# Altium PCB Battery_Converter.PcbDoc (part 1 of 2)
Units mm, origin at the board's own origin, x right, y up, seen from the top; angles counter-clockwise.
Board outline 240.65 x 121.03 mm, 2 copper layers (Power Layer, Signal Layer), stack 0.532 mm thick; 177 components, 92 nets, 492 pads, 9 vias.
Unrouted connection lines stored in the file: 129.
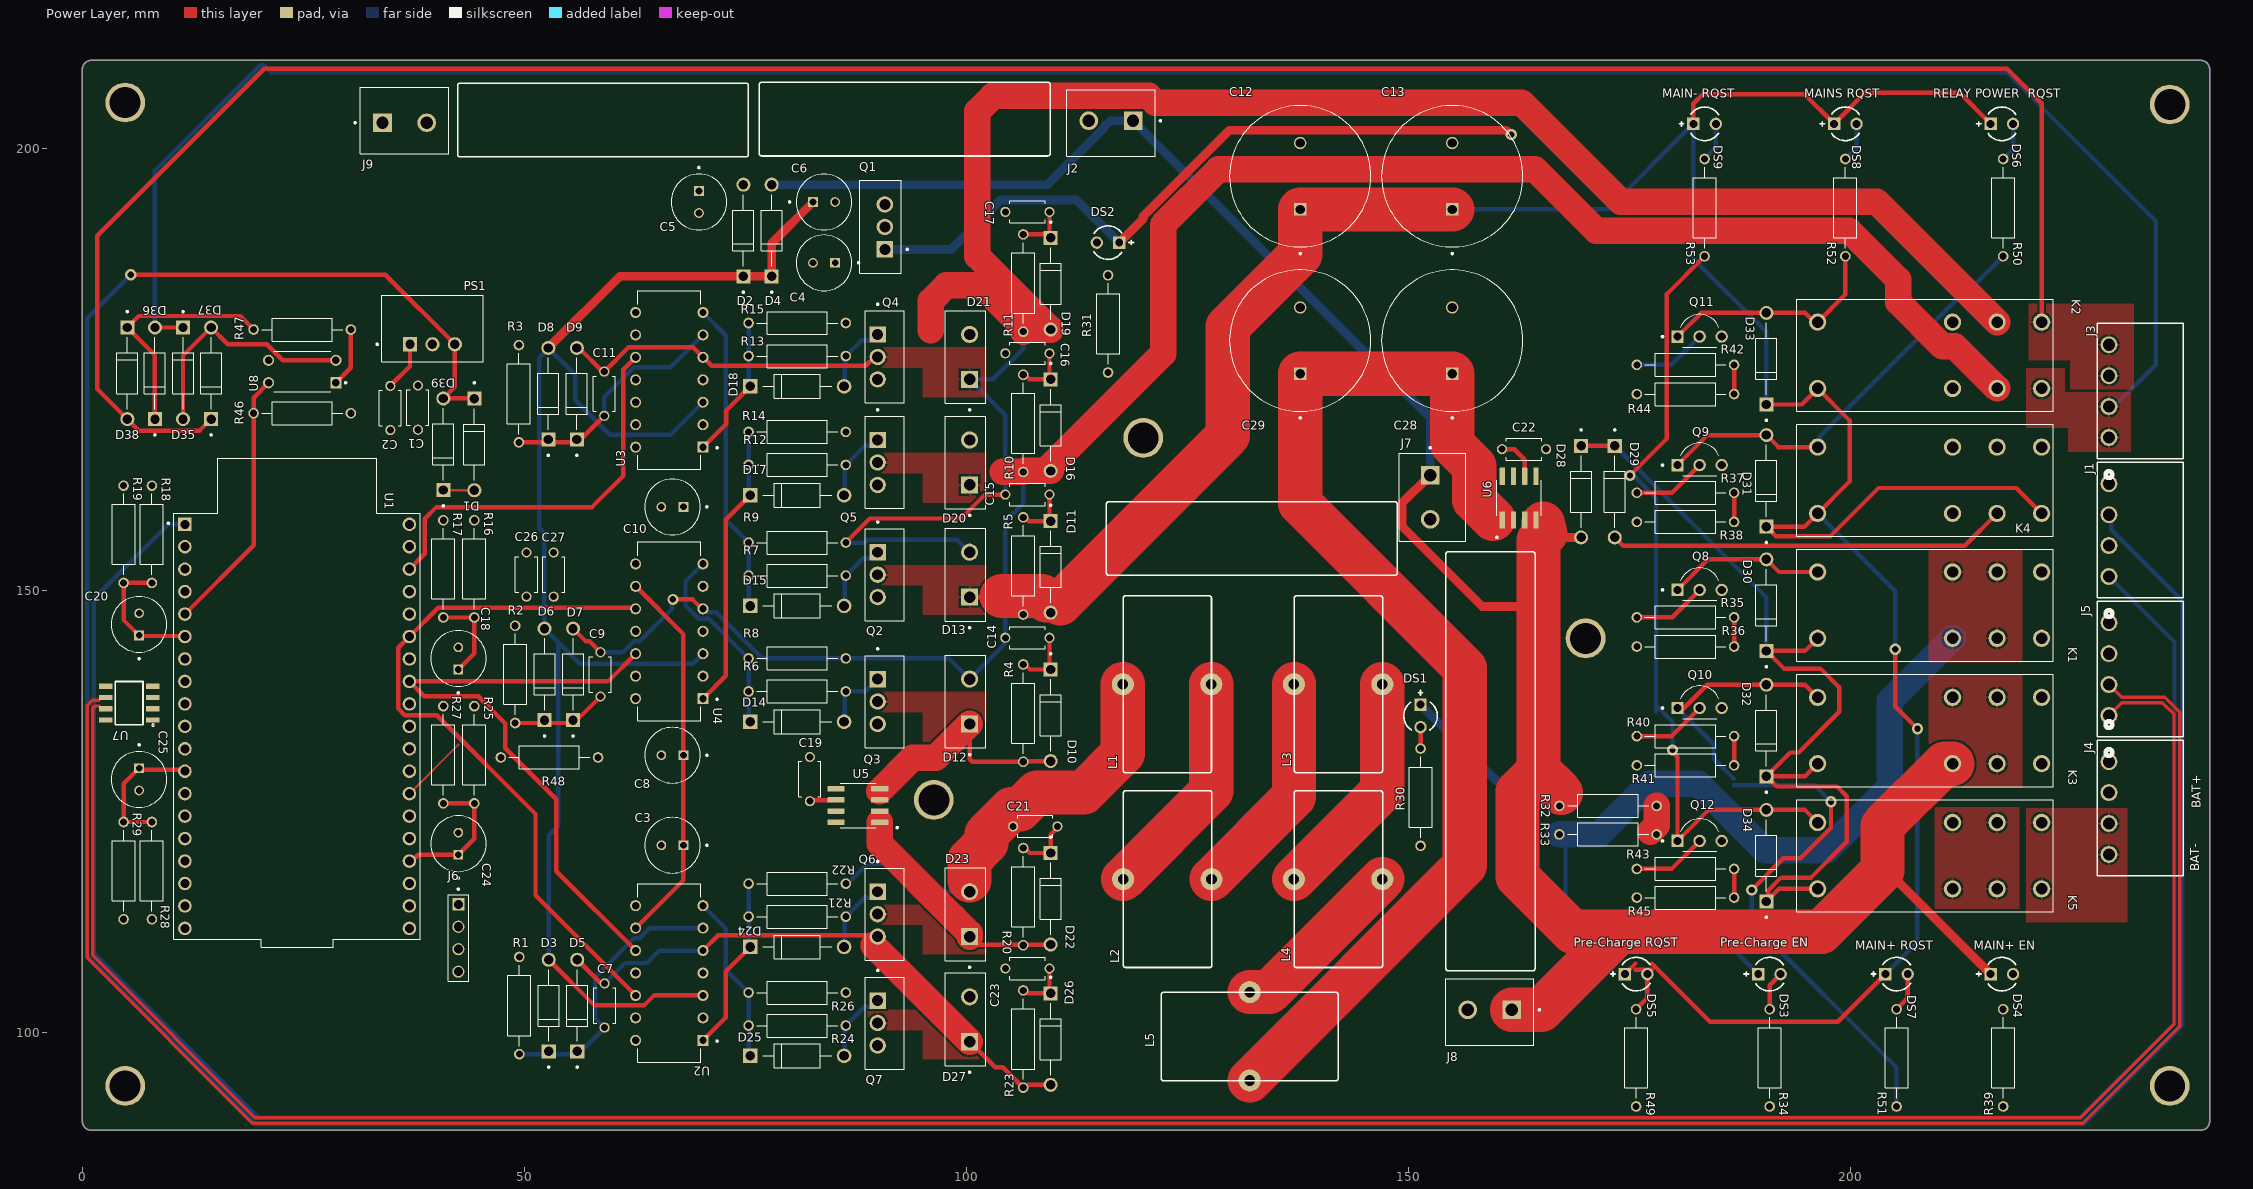
[diagram p0: Power Layer view]
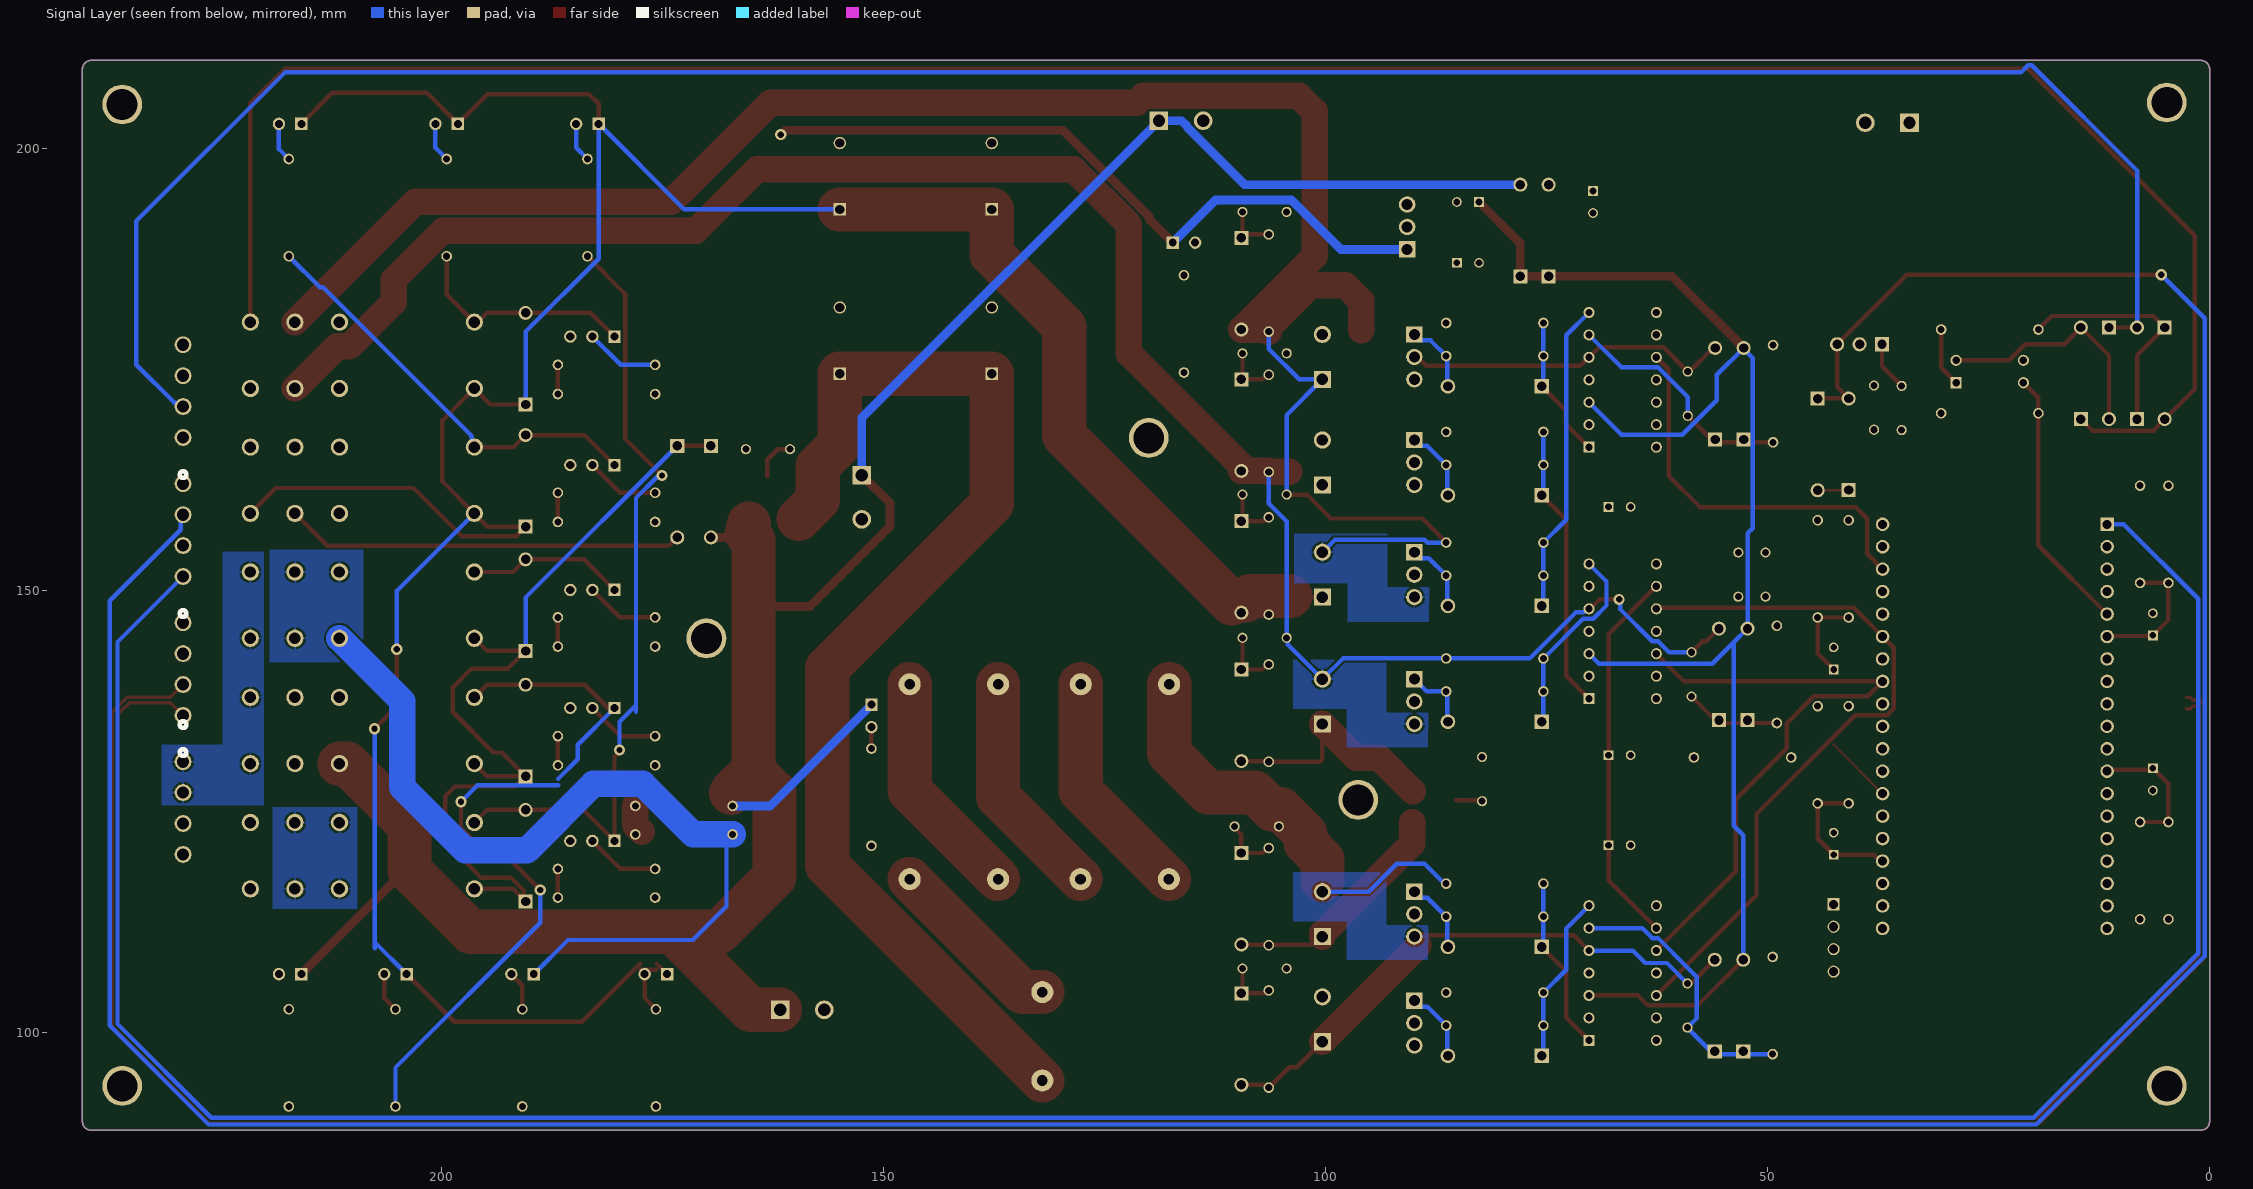
[diagram p1: Signal Layer view, seen from below]
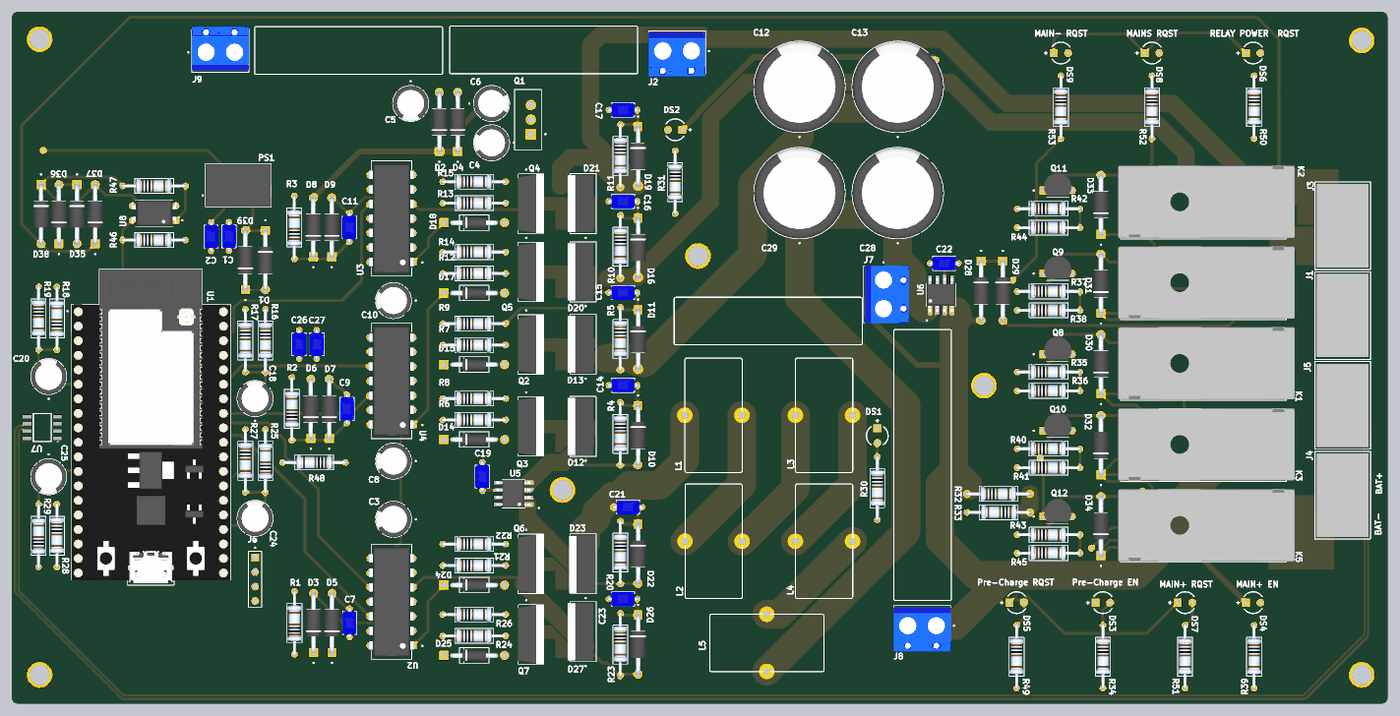
[diagram p2: 3D render of the assembled board from above, using the file's embedded part models]

## Layer stack, top to bottom
Top Solder: solder mask 0.0102, Solder Resist, Dk 3.5
Power Layer: signal copper 0.035
Dielectric 2: prepreg 0.0711, PP-006, Dk 4.1
Dielectric 1: dielectric 0.32, FR-4, Dk 4.8
Dielectric 3: prepreg 0.0711, PP-006, Dk 4.1
Signal Layer: signal copper 0.035
Bottom Solder: solder mask 0.0102, Solder Resist, Dk 3.5

## Board outline
0,89.891 0,208.922 cw(c1,208.922) 1,209.922 239.649,209.922 cw(c239.649,208.922) 240.649,208.922 240.649,89.891 cw(c239.649,89.891) 239.649,88.891 1,88.891 cw(c1,89.891)

## Design rules (kind name [scope] priority, off if disabled: settings)
Clearance [All] p1: gap=0.254 ignorepadtopadclearanceinfootprint=FALSE except(0: Arc-Hole Track-Hole SMDPad-Hole THPad-Hole Via-Hole Fill-Hole Poly-Hole Region-Hole Text-Hole)
DiffPairsRouting [All] p1: maxlimit=0.254 minlimit=0.254 mostfreqgap=0.254 toplayer_minwidth=0.381 toplayer_maxwidth=0.381 toplayer_prefwidth=0.381 bottomlayer_minwidth=0.381 bottomlayer_maxwidth=0.381 bottomlayer_prefwidth=0.381 maxuncoupledlength=12.7
PolygonConnect DirectPour_Battery [InNetClass('DirectPour')] p1: connectstyle=Direct reliefconductorwidth=0.254 reliefentries=4 polygonreliefangle="90 Angle" airgapwidth=0.254
PolygonConnect [All] p2: connectstyle=Relief reliefconductorwidth=0.254 reliefentries=4 polygonreliefangle="90 Angle" airgapwidth=0.254
RoutingVias [All] p1: holewidth=0.711 width=1.27 viastyle="Through Hole" minholewidth=0.711 minwidth=1.27 maxholewidth=0.711 maxwidth=1.27
SolderMaskExpansion [All] p1: expansion=0.102 istentingtop=FALSE
Width [All] p1: maxlimit=5 minlimit=0.254 preferedwidth=0.5 minimp=50.000000 maximp=50.000000 favimp=50.000000
29 further rules are at their usual default settings.

## Classes and differential pairs
polygon class DirectConmnect: +12_L01_P003
component class Zero-Cross_Detection: D35 D36 D37 D38 R46 R47 U8
component class "Power Circuit": D28 D29 D30 D31 D32 D33 D34 DS3 DS4 DS5 DS6 DS7 DS8 DS9 K1 K2 K3 K4 K5 Q8 Q9 Q10 Q11 Q12 R32 R33 R34 R35 R36 R37 R38 R39 R40 R41 R42 R43 R44 R45 R49 R50 R51 R52 R53
component class IR2110: C3 C4 C5 C6 C7 C8 C9 C10 C11 D2 D3 D4 D5 D6 D7 D8 D9 Q1 R1 R2 R3 U2 U3 U4
component class ESP32: C1 C2 D1 D39 PS1 U1
component class Connectors: DS1 DS2 J1 J2 J3 J4 J5 J6 J7 J8 J9 R30 R31
component class Communication: C26 C27 IC1 R48 U7
component class Bi_Dir_Circuit: C12 C13 C14 C15 C16 C17 C18 C19 C20 C21 C22 C23 C24 C25 C28 C29 D10 D11 D12 D13 D14 D15 D16 D17 D18 D19 D20 D21 D22 D23 D24 D25 D26 D27 L1 L2 L3 L4 L5 Q2 Q3 Q4 Q5 Q6 Q7 R4 R5 R6 R7 R8 R9 R10 R11 R12 R13 R14 R15 R16 R17 R18 R19 R20 R21 R22 R23 R24 R25 R26 R27 R28 R29 U5 U6
differential pair CAN_1: +CAN_1_P -CAN_1_N

## Components (designator, comment, footprint, x,y, rotation, side; value= is the part's Value field where it differs from the comment)
C1 "Ceramic Capacitor" "Ceramic Capacitor" 37.96,170.637 r90 top
C2 "Ceramic Capacitor" "Ceramic Capacitor" 34.836,170.601 r90 top
C3 "10uF Cap" CAP_10uF 66.746,121.133 r180 top
C4 "10uF Cap" CAP_10uF 83.902,187.02 r180 top
C5 "10uF" CAP_10uF 69.748,193.904 r270 top
C6 "10uF Cap" CAP_10uF 83.902,193.904 r0 top
C7 "0.1uF" "Ceramic Capacitor" 59.08,102.997 r270 top
C8 "10uF Cap" CAP_10uF 66.746,131.318 r180 top
C9 "0.1uF" "Ceramic Capacitor" 58.607,140.462 r270 top
C10 "10uF Cap" CAP_10uF 66.746,159.41 r180 top
C11 "0.1uF" "Ceramic Capacitor" 59.039,172.212 r270 top
C12 "10uF Cap" 2200uF_Cap 137.77,196.815 r90 top
C13 "10uF Cap" 2200uF_Cap 154.965,196.815 r90 top
C14 "Ceramic Capacitor" "Ceramic Capacitor" 106.909,144.602 r0 top
C15 "Ceramic Capacitor" "Ceramic Capacitor" 106.909,160.807 r0 top
C16 "Ceramic Capacitor" "Ceramic Capacitor" 106.909,176.784 r0 top
C17 "Ceramic Capacitor" "Ceramic Capacitor" 106.909,192.786 r0 top
C18 "10uF Cap" CAP_10uF 42.532,142.271 r90 top
C19 "1nF" "Ceramic Capacitor" 82.296,128.615 r270 top
C20 "10uF Cap" CAP_10uF 6.413,146.123 r90 top
C21 "Ceramic Capacitor" "Ceramic Capacitor" 107.798,123.266 r0 top
C22 "1nF" "Ceramic Capacitor" 163.093,165.938 r180 top
C23 "Ceramic Capacitor" "Ceramic Capacitor" 106.909,107.188 r0 top
C24 "10uF Cap" CAP_10uF 42.532,121.31 r90 top
C25 "10uF Cap" CAP_10uF 6.413,128.58 r270 top
C26 "Ceramic Capacitor" "Ceramic Capacitor" 50.241,151.75 r270 top
C27 "Ceramic Capacitor" "Ceramic Capacitor" 53.315,151.75 r270 top
C28 "10uF Cap" 2200uF_Cap 154.965,178.222 r90 top
C29 "10uF Cap" 2200uF_Cap 137.77,178.222 r90 top
D1 "Schottky Diode" "Common Trhough Hole" 44.335,166.472 r270 top
D2 "Schottky Diode" "Common Trhough Hole" 74.778,190.678 r90 top
D3 "Fast-Rect Diode" "Common Trhough Hole" 52.756,102.997 r90 top
D4 "Schottky Diode" "Common Trhough Hole" 77.978,190.678 r90 top
D5 "1N4110" "Common Trhough Hole" 55.982,102.997 r90 top
D6 "Fast-Rect Diode" "Common Trhough Hole" 52.282,140.462 r90 top
D7 "1N4110" "Common Trhough Hole" 55.508,140.462 r90 top
D8 "Fast-Rect Diode" "Common Trhough Hole" 52.714,172.212 r90 top
D9 "1N4110" "Common Trhough Hole" 55.94,172.212 r90 top
D10 "Normal Diode" "Common Trhough Hole" 109.533,135.831 r270 top
D11 "Normal Diode" "Common Trhough Hole" 109.533,152.62 r270 top
D12 "MBR10100" MBR10100 99.919,137.389 r90 top
D13 "MBR10100" MBR10100 99.919,151.74 r90 top
D14 "1N4148" "1N4007 DIODE" 80.864,135.102 r0 top
D15 "1N4148" "1N4007 DIODE" 80.864,148.209 r0 top
D16 "Normal Diode" "Common Trhough Hole" 109.533,168.656 r270 top
D17 "1N4148" "1N4007 DIODE" 80.864,160.731 r0 top
D18 "1N4148" "1N4007 DIODE" 80.864,173.05 r0 top
D19 "Normal Diode" "Common Trhough Hole" 109.533,184.658 r270 top
D20 "MBR10100" MBR10100 99.919,164.44 r90 top
D21 "MBR10100" MBR10100 99.919,176.378 r90 top
D22 "Normal Diode" "Common Trhough Hole" 109.533,115.079 r270 top
D23 "MBR10100" MBR10100 99.919,113.335 r90 top
D24 "1N4148" "1N4007 DIODE" 80.864,109.626 r0 top
D25 "1N4148" "1N4007 DIODE" 80.864,97.307 r0 top
D26 "Normal Diode" "Common Trhough Hole" 109.533,99.204 r270 top
D27 "MBR10100" MBR10100 99.919,101.448 r90 top
D28 "1N4007" "Common Trhough Hole" 169.545,161.138 r270 top
D29 "1N4007" "Common Trhough Hole" 173.355,161.138 r270 top
D30 "Normal Diode" "Common Trhough Hole" 190.511,148.294 r90 top
D31 "Normal Diode" "Common Trhough Hole" 190.511,162.357 r90 top
D32 "Normal Diode" "Common Trhough Hole" 190.511,134.112 r90 top
D33 "Normal Diode" "Common Trhough Hole" 190.511,176.174 r90 top
D34 "Normal Diode" "Common Trhough Hole" 190.511,119.948 r90 top
D35 "Normal Diode" "Common Trhough Hole" 11.383,174.523 r270 top
D36 "Normal Diode" "Common Trhough Hole" 8.208,174.523 r90 top
D37 "Normal Diode" "Common Trhough Hole" 14.558,174.523 r90 top
D38 "Normal Diode" "Common Trhough Hole" 5.084,174.523 r270 top
D39 "Schottky Diode" "Common Trhough Hole" 40.83,166.497 r90 top
DS1 "LTL-1CHE" LED3mm 151.384,135.763 r270 top
DS2 "LTL-1CHE" LED3mm 116.027,189.306 r180 top
DS3 "LTL-1CHE" LED3mm 190.856,106.553 r0 top
DS4 "LTL-1CHE" LED3mm 217.145,106.552 r0 top
DS5 "LTL-1CHE" LED3mm 175.768,106.553 r0 top
DS6 "LTL-1CHE" LED3mm 217.145,202.742 r0 top
DS7 "LTL-1CHE" LED3mm 205.232,106.552 r0 top
DS8 "LTL-1CHE" LED3mm 199.441,202.742 r0 top
DS9 "LTL-1CHE" LED3mm 183.515,202.742 r0 top
J1 "4P - Right 3.5mm Industrial Connector" "4P - Right 3.5mm Industrial Connector" 229.26,151.536 r90 top
J2 "KF301-2P" KF301-2P 116.357,203.098 r180 top
J3 "4P - Right 3.5mm Industrial Connector" "4P - Right 3.5mm Industrial Connector" 229.26,167.259 r90 top
J4 "4P - Right 3.5mm Industrial Connector" "4P - Right 3.5mm Industrial Connector" 229.26,130.591 r270 top
J5 "4P - Right 3.5mm Industrial Connector" "4P - Right 3.5mm Industrial Connector" 229.26,135.814 r90 top
J6 "4-POS 2.54mm Header" "4-POS 2.54mm Header" 42.532,114.452 r270 top
J7 "KF301-2P" KF301-2P 152.476,160.503 r270 top
J8 "KF301-2P" KF301-2P 159.218,102.514 r180 top
J9 "KF301-2P" KF301-2P 36.449,202.87 r0 top
K1 "relay 8pin" "Relay socket 8pin" 208.977,148.294 r0 top
K2 "relay 8pin" "Relay socket 8pin" 208.977,176.555 r0 top
K3 "relay 8pin" "Relay socket 8pin" 208.977,134.112 r0 top
K4 "relay 8pin" "Relay socket 8pin" 208.977,162.424 r0 top
K5 "relay 8pin" "Relay socket 8pin" 208.977,119.948 r0 top
L1 "Coil_62125" "Coil 65125" 117.704,139.344 r0 top
L2 "Coil_62125" "Coil 65125" 117.736,117.297 r0 top
L3 "Coil_62125" "Coil 65125" 137.058,139.344 r0 top
L4 "Coil_62125" "Coil 65125" 137.059,117.297 r0 top
L5 "Coil_62125" "Coil 65125" 132.055,104.521 r270 top
PS1 "R-78K5.0-0.5" CONV_R-78K5.0-0.5 39.603,179.578 r0 top
Q1 "LM7805CT" LM7805CT 90.778,191.084 r90 top
Q2 "IRF530NPBF" IRF530N 90.778,151.74 r270 top
Q3 "IRF530NPBF" IRF530N 90.778,137.389 r270 top
Q4 "IRF530NPBF" IRF530N 90.778,176.378 r270 top
Q5 "IRF530NPBF" IRF530N 90.778,164.44 r270 top
Q6 "IRF530NPBF" IRF530N 90.778,113.335 r270 top
Q7 "IRF530NPBF" IRF530N 90.778,101.016 r270 top
Q8 "BC548" bc548 182.956,150.673 r0 top
Q9 "BC548" bc548 182.956,164.795 r0 top
Q10 "BC548" bc548 182.956,137.312 r0 top
Q11 "BC548" bc548 182.956,179.332 r0 top
Q12 "BC548" bc548 182.956,122.276 r0 top
R1 "Resistor" "Resistor_Through Hole" 49.428,102.997 r90 top
R2 "Resistor" "Resistor_Through Hole" 48.955,140.462 r90 top
R3 "Resistor" "Resistor_Through Hole" 49.387,172.212 r90 top
R4 "Resistor" "Resistor_Through Hole" 106.435,136.081 r270 top
R5 "Resistor" "Resistor_Through Hole" 106.435,152.73 r270 top
R6 "15R" "Resistor_Through Hole" 80.864,138.531 r0 top
R7 "15R" "Resistor_Through Hole" 80.864,151.638 r0 top
R8 "10K" "Resistor_Through Hole" 80.864,142.265 r0 top
R9 "10K" "Resistor_Through Hole" 80.864,155.372 r0 top
R10 "Resistor" "Resistor_Through Hole" 106.435,168.859 r270 top
R11 "Resistor" "Resistor_Through Hole" 106.435,184.734 r270 top
R12 "15R" "Resistor_Through Hole" 80.864,164.16 r0 top
R13 "15R" "Resistor_Through Hole" 80.864,176.479 r0 top
R14 "10K" "Resistor_Through Hole" 80.864,167.894 r0 top
R15 "10K" "Resistor_Through Hole" 80.864,180.213 r0 top
R16 "8.2K" "Resistor_Through Hole" 44.335,152.4 r270 top
R17 "1K" "Resistor_Through Hole" 40.83,152.4 r270 top
R18 "5.1K" "Resistor_Through Hole" 7.861,156.308 r90 top
R19 "10K" "Resistor_Through Hole" 4.66,156.308 r270 top
R20 "Resistor" "Resistor_Through Hole" 106.435,115.316 r270 top
R21 "15R" "Resistor_Through Hole" 80.864,113.055 r0 top
R22 "10K" "Resistor_Through Hole" 80.864,116.789 r0 top
R23 "Resistor" "Resistor_Through Hole" 106.435,99.212 r270 top
R24 "15R" "Resistor_Through Hole" 80.864,100.736 r0 top
R25 "8.2K" "Resistor_Through Hole" 44.335,131.369 r90 top
R26 "10K" "Resistor_Through Hole" 80.864,104.47 r0 top
R27 "1K" "Resistor_Through Hole" 40.83,131.369 r270 top
R28 "5.1K" "Resistor_Through Hole" 7.861,118.262 r270 top
R29 "10K" "Resistor_Through Hole" 4.66,118.262 r90 top
R30 "Resistor_Through Hole" "Resistor_Through Hole" 151.384,126.569 r270 top
R31 "Resistor_Through Hole" "Resistor_Through Hole" 116.027,180.112 r270 top
R32 "Resistor" "Resistor_Through Hole" 172.593,125.578 r0 top
R33 "Resistor" "Resistor_Through Hole" 172.593,122.352 r180 top
R34 "Resistor_Through Hole" "Resistor_Through Hole" 190.881,97.079 r270 top
R35 "Resistor_Through Hole" "Resistor_Through Hole" 181.356,146.914 r0 top
R36 "Resistor_Through Hole" "Resistor_Through Hole" 181.356,143.612 r0 top
R37 "Resistor_Through Hole" "Resistor_Through Hole" 181.356,161.011 r0 top
R38 "Resistor_Through Hole" "Resistor_Through Hole" 181.356,157.709 r0 top
R39 "Resistor_Through Hole" "Resistor_Through Hole" 217.297,97.078 r270 top
R40 "Resistor_Through Hole" "Resistor_Through Hole" 181.356,133.477 r0 top
R41 "Resistor_Through Hole" "Resistor_Through Hole" 181.356,130.175 r0 top
R42 "Resistor_Through Hole" "Resistor_Through Hole" 181.356,175.477 r0 top
R43 "Resistor_Through Hole" "Resistor_Through Hole" 181.356,118.451 r0 top
R44 "Resistor_Through Hole" "Resistor_Through Hole" 181.356,172.175 r0 top
R45 "Resistor_Through Hole" "Resistor_Through Hole" 181.356,115.214 r0 top
R46 "Resistor" "Resistor_Through Hole" 24.87,170.002 r0 top
R47 "Resistor" "Resistor_Through Hole" 24.87,179.476 r0 top
R48 "Resistor" "Resistor_Through Hole" 52.832,131.064 r180 top
R49 "Resistor_Through Hole" "Resistor_Through Hole" 175.768,97.079 r270 top
R50 "Resistor_Through Hole" "Resistor_Through Hole" 217.297,193.268 r270 top
R51 "Resistor_Through Hole" "Resistor_Through Hole" 205.232,97.078 r270 top
R52 "Resistor_Through Hole" "Resistor_Through Hole" 199.441,193.268 r270 top
R53 "Resistor_Through Hole" "Resistor_Through Hole" 183.515,193.268 r270 top
U1 "ESP32-DEVKITC-32U" MODULE_ESP32-DEVKITC-32U 24.295,134.595 r0 top
U2 "IR2110" IR2110 66.396,106.68 r180 top
U3 "IR2110" IR2110 66.396,173.787 r180 top
U4 "IR2110" IR2110 66.396,145.339 r180 top
U5 "ACS712" ACS712 87.732,125.628 r180 top
U6 "ACS712" ACS712 162.535,160.401 r90 top
U7 "MCP2562-E/SN" MCP2562-E/SN 5.295,137.211 r180 top
U8 "PC817" PC817 24.87,174.727 r180 top
? "M3 Mounting Hole" "M3 - Mounting Hole"#1 170.053,144.526 r0 top
? "M3 Mounting Hole" "M3 - Mounting Hole"#1 96.317,126.263 r90 top
? "M3 Mounting Hole" "M3 - Mounting Hole"#1 120.015,167.208 r0 top
? "M3 Mounting Hole" "M3 - Mounting Hole"#2 235.894,204.931 r0 top
? "M3 Mounting Hole" "M3 - Mounting Hole"#1 236.144,93.9 r0 top
? "M3 Mounting Hole" "M3 - Mounting Hole"#1 4.836,205.156 r0 top
? "M3 Mounting Hole" "M3 - Mounting Hole"#3 9.169,93.066 r0 top

## Footprints (in the part's own frame and the unit in brackets; to place one, negate y for a bottom-side part, rotate by r counter-clockwise, add the part's x,y. Pads: shape width x height; smd on the part's side, far side on the other; paste and mask are expansions set on the pad)
"1N4007 DIODE" [mm]
  round 1.65 hole 1.1: A(5.3,0)
  rect 1.65x1.65 / inner round 1.65 / far side rect 1.65x1.65 hole 1.1: C(-5.3,0)
  silkscreen extent -3.9,-1.35 3.9,1.35, body extent -4.24,-1 4.24,1, height 2
"4-POS 2.54mm Header" [mm]
  rect 1.37x1.37 hole 1.02: 1(0,0)
  round 1.37 hole 1.02: 2(2.54,0) 3(5.08,0) 4(7.62,0)
  silkscreen extent -1.82,-1.17 8.69,1.17
"4P - Right 3.5mm Industrial Connector" [mil]
  round 75 / inner round 60 / far side round 75 hole 55 paste-99999 mask+0: 1(0,0) 2(137.8,0) 3(275.59,0) 4(413.39,0)
  silkscreen extent -180,-332 509,52, body extent -80,-317 494,45, height 274
2200uF_Cap [mm]
  round 1.4 hole 1.05: N(3.75,0)
  rect 1.4x1.4 hole 1.05: P(-3.75,0)
  silkscreen extent -8.85,-8 8,8, body extent -8,-8 8,8, height 31.5
ACS712 [mm]
  rrect25% 1.97x0.6 smd: 1(-2.475,1.905) 2(-2.475,0.635) 3(-2.475,-0.635) 4(-2.475,-1.905) 5(2.475,-1.905) 6(2.475,-0.635) 7(2.475,0.635) 8(2.475,1.905)
  silkscreen extent -4.54,-2.52 2,2.6, body extent -3,-2.45 3,2.45, height 1.75
bc548 [mm]
  rect 1.4x1.4 hole 0.93: 1(-2.5,-0.655)
  round 1.4 hole 0.93: 2(0,-0.655) 3(2.5,-0.655)
  silkscreen extent -4.3,-1.85 2.18,1.85, body extent -2.4,-1.53 2.4,2.4, height 7.74
CAP_10uF [mm]
  round 1.1 hole 0.75: N(1.25,0)
  rect 1.1x1.1 hole 0.75: P(-1.25,0)
  silkscreen extent -4,-3.15 3.15,3.15, body extent -3.15,-3.15 3.15,3.15, height 11.2
"Ceramic Capacitor" [mm] "22pF"
  round 1.15 hole 0.8: 1(-2.5,0) 2(2.5,0)
  silkscreen extent -2,-1.25 2,1.25, body extent -2.75,-1.25 2.75,1.25, height 5.5
"Coil 65125" [mm]
  round 2.5 hole 1.2: 1(0,0) 2(10,0)
  silkscreen extent 0.03,-10 10.03,10
"Common Trhough Hole" [mm]
  rect 1.59x1.59 / inner round 1.59 / far side rect 1.59x1.59 hole 1.06: 1(-5.18,0)
  round 1.59 hole 1.06: 2(5.18,0)
  silkscreen extent -7.07,-1.19 4.07,1.19, body extent -5.29,-1.36 5.29,1.36, height 2.72
CONV_R-78K5.0-0.5 [mm]
  rect 1.605x1.605 / inner round 1.605 / far side rect 1.605x1.605 hole 1.07: 1(-2.54,-1.775)
  round 1.605 hole 1.07: 2(0,-1.775) 3(2.54,-1.775)
  silkscreen extent -6.35,-3.77 5.75,3.77, body extent -5.75,-3.77 5.75,3.77, height 10.2
IR2110 [mm]
  rect 1.25x1.25 / inner round 1.25 / far side rect 1.25x1.25 hole 0.83: 1(-3.81,7.62)
  round 1.25 hole 0.83: 2(-3.81,5.08) 3(-3.81,2.54) 4(-3.81,0) 5(-3.81,-2.54) 6(-3.81,-5.08) 7(-3.81,-7.62) 8(3.81,-7.62) 9(3.81,-5.08) 10(3.81,-2.54) 11(3.81,0) 12(3.81,2.54) 13(3.81,5.08) 14(3.81,7.62)
  silkscreen extent -5.5,-10.1 3.56,10.1, body extent -3.96,-9.65 3.96,9.65, height 5.33
IRF530N [mm]
  rect 1.845x1.845 hole 1.23: 1(-2.54,-0.81)
  round 1.845 hole 1.23: 2(0,-0.81) 3(2.54,-0.81)
  silkscreen extent -6.06,-2.22 5.21,2.22, body extent -5.21,-2.22 5.21,2.22, height 19.3
KF301-2P [mm]
  rect 2.1x2.1 hole 1.4: 1(-2.5,0)
  round 2.1 hole 1.4: 2(2.5,0)
  silkscreen extent -5.7,-3.5 5,4, body extent -5,-3.2 5,4.5, height 10
LED3mm [mm] "THD, 2-Leads, Dia 3.8mm, Pitch 2.54mm"
  rect 1.4x1.4 hole 0.9: 1(-1.27,0)
  round 1.4 hole 0.9: 2(1.27,0)
  silkscreen extent -2.87,-1.9 1.58,1.9, body extent -1.9,-1.9 1.9,1.9, height 6.5
LM7805CT [mm]
  rect 1.86x1.86 hole 1.24: 1(-2.54,0)
  round 1.86 hole 1.24: 2(0,0) 3(2.54,0)
  silkscreen extent -5.27,-2.64 5.27,2.86
"M3 - Mounting Hole"#1 [mm]
  round 4.5 / inner round 1.524 / far side round 4.5 hole 3.5: 1(0,0)
"M3 - Mounting Hole"#2 [mm]
  round 4.5 / inner round 1.524 / far side round 4.5 hole 3.5: 1(0.254,0)
"M3 - Mounting Hole"#3 [mm]
  round 4.5 / inner round 1.524 / far side round 4.5 hole 3.5: 1(-4.333,0.834)
MBR10100 [mm]
  rect 1.94x1.94 / inner round 1.94 / far side rect 1.94x1.94 hole 1.29: 1(-2.54,-0.453)
  round 1.94 hole 1.29: 3(2.54,-0.453)
  silkscreen extent -6.1,-2.29 5.25,2.29, body extent -4.98,-1.78 4.98,2.66, height 19.05
MCP2562-E/SN [mm]
  rect 1.5x0.6 smd: 1(-2.65,1.905) 2(-2.65,0.635) 3(-2.65,-0.635) 4(-2.65,-1.905) 5(2.65,-1.905) 6(2.65,-0.635) 7(2.65,0.635) 8(2.65,1.905)
  silkscreen extent -2.84,-2.45 1.58,2.64
MODULE_ESP32-DEVKITC-32U [mm]
  rect 1.53x1.53 / inner round 1.53 / far side rect 1.53x1.53 hole 1.02 mask+0.05: 1(-12.7,22.85)
  round 1.53 hole 1.02 mask+0.05: 2(-12.7,20.31) 3(-12.7,17.77) 4(-12.7,15.23) 5(-12.7,12.69) 6(-12.7,10.15) 7(-12.7,7.61) 8(-12.7,5.07) 9(-12.7,2.53) 10(-12.7,-0.01) 11(-12.7,-2.55) 12(-12.7,-5.09) 13(-12.7,-7.63) 14(-12.7,-10.17) 15(-12.7,-12.71) 16(-12.7,-15.25) 17(-12.7,-17.79) 18(-12.7,-20.33) 19(-12.7,-22.87) 20(12.7,-22.87) 21(12.7,-20.33) 22(12.7,-17.79) 23(12.7,-15.25) 24(12.7,-12.71) 25(12.7,-10.17) 26(12.7,-7.63) 27(12.7,-5.09) 28(12.7,-2.55) 29(12.7,-0.01) 30(12.7,2.53) 31(12.7,5.07) 32(12.7,7.61) 33(12.7,10.15) 34(12.7,12.69) 35(12.7,15.23) 36(12.7,17.77) 37(12.7,20.31) 38(12.7,22.85)
  silkscreen extent -14.67,-25 13.95,30.3, body extent -13.95,-24.62 13.95,30.3, height 7.95
PC817 [mm]
  rect 1.26x1.26 / inner round 1.26 / far side rect 1.26x1.26 hole 0.84: 1(-3.81,1.27)
  round 1.26 hole 0.84: 2(-3.81,-1.27) 3(3.81,-1.27) 4(3.81,1.27)
  silkscreen extent -5.01,-2.3 3.25,2.3, body extent -3.94,-2.3 3.94,2.3, height 4.55
"Relay socket 8pin" [mm]
  round 1.95 hole 1.3: 11(7.63,-3.75) 12(2.59,-3.75) 14(12.67,-3.75) 21(7.63,3.75) 22(2.59,3.75) 24(12.67,3.75) A1(-12.67,-3.75) A2(-12.67,3.75)
  silkscreen extent -15.02,-6.35 13.98,6.35, body extent -15.48,-6.2 15.48,6.45, height 8.9
"Resistor_Through Hole" [mm]
  round 1.2 hole 0.8: 1(-5.5,0) 2(5.5,0)
  silkscreen extent -4.58,-1.3 4.58,1.3, body extent -5.84,-1.29 5.71,1.29, height 2.6

## Part data
C1 C2 C14 C15 C16 C17 C21 C23 C26 C27: Package="0805 AVX", Availability="In Stock", Check_prices=https://www.snapeda.com/parts/LD051A121KAB2A/AVX/view-part/?ref=eda, MF=AVX, MP=LD051A121KAB2A, Price=None, Purchase-URL=https://pricing.snapeda.com/search/part/LD051A121KAB2A/?ref=eda, SnapEDA_Link=https://www.snapeda.com/parts/LD051A121KAB2A/AVX/view-part/?ref=snap
C3 C4 C6 C8 C10 C12 C13 C18 C20 C24 C25 C28 C29: "CAP ALUM 10UF 20% 50V RADIAL", Package="RADIAL-2 Panasonic", Availability="In Stock", Check_prices=https://www.snapeda.com/parts/ECE-A1HN100UI/Panasonic/view-part/2321690/?ref=eda, MF=Panasonic, MP=ECE-A1HN100UI, Price=None, SnapEDA_Link=https://www.snapeda.com/parts/ECE-A1HN100UI/Panasonic/view-part/2321690/?ref=snap
C5: library part "10uF Cap", "CAP ALUM 10UF 20% 50V RADIAL", Package="RADIAL-2 Panasonic", Availability="In Stock", Check_prices=https://www.snapeda.com/parts/ECE-A1HN100UI/Panasonic/view-part/2321690/?ref=eda, MF=Panasonic, MP=ECE-A1HN100UI, Price=None, SnapEDA_Link=https://www.snapeda.com/parts/ECE-A1HN100UI/Panasonic/view-part/2321690/?ref=snap
C7 C9 C11 C19 C22: library part "Ceramic Capacitor", Package="0805 AVX", Availability="In Stock", Check_prices=https://www.snapeda.com/parts/LD051A121KAB2A/AVX/view-part/?ref=eda, MF=AVX, MP=LD051A121KAB2A, Price=None, Purchase-URL=https://pricing.snapeda.com/search/part/LD051A121KAB2A/?ref=eda, SnapEDA_Link=https://www.snapeda.com/parts/LD051A121KAB2A/AVX/view-part/?ref=snap
D1 D2 D4 D12 D13 D20 D21 D23 D27 D39: Package="DO-41 Diodes Inc.", Availability="In Stock", Check_prices=https://www.snapeda.com/parts/1N5817-T/Diodes+Inc./view-part/?ref=eda, MF="Diodes Inc.", MP=1N5817-T, Price=None, Purchase-URL=https://pricing.snapeda.com/search/part/1N5817-T/?ref=eda, SnapEDA_Link=https://www.snapeda.com/parts/1N5817-T/Diodes+Inc./view-part/?ref=snap
D3 D6 D8 D28 D29: library part "Normal Diode", Package="DO-41 NTE Electronics", Availability="In Stock", Check_prices=https://www.snapeda.com/parts/1N4007/NTE+Electronics/view-part/?ref=eda, MF="NTE Electronics, Inc.", MP=1N4007, Price=None, Purchase-URL=https://pricing.snapeda.com/search/part/1N4007/?ref=eda, SnapEDA_Link=https://www.snapeda.com/parts/1N4007/NTE+Electronics/view-part/?ref=snap
D5 D7 D9: library part "Zener Diode", Package="SMA-2 Taiwan Semiconductor", Availability="In Stock", Check_prices=https://www.snapeda.com/parts/1SMA5926/Taiwan+Semiconductor/view-part/?ref=eda, MF="Taiwan Semiconductor", MP=1SMA5926, Price=None, Purchase-URL=https://pricing.snapeda.com/search/part/1SMA5926/?ref=eda, SnapEDA_Link=https://www.snapeda.com/parts/1SMA5926/Taiwan+Semiconductor/view-part/?ref=snap
D10 D11 D16 D19 D22 D26 D30 D31 D32 D33 D34 D35 D36 D37 D38: Package="DO-41 NTE Electronics", Availability="In Stock", Check_prices=https://www.snapeda.com/parts/1N4007/NTE+Electronics/view-part/?ref=eda, MF="NTE Electronics, Inc.", MP=1N4007, Price=None, Purchase-URL=https://pricing.snapeda.com/search/part/1N4007/?ref=eda, SnapEDA_Link=https://www.snapeda.com/parts/1N4007/NTE+Electronics/view-part/?ref=snap
D14 D15 D17 D18 D24 D25: library part 1N4007, "Diode Standard 1000 V 1A Through Hole DO-41", Package="DO-41 NTE Electronics", Availability="In Stock", Check_prices=https://www.snapeda.com/parts/1N4007/NTE+Electronics/view-part/?ref=eda, MF="NTE Electronics, Inc.", MP=1N4007, Price=None, Purchase-URL=https://pricing.snapeda.com/search/part/1N4007/?ref=eda, SnapEDA_Link=https://www.snapeda.com/parts/1N4007/NTE+Electronics/view-part/?ref=snap
DS1 DS2 DS3 DS4 DS5 DS6 DS7 DS8 DS9: library part "RED_LED 3mm", "Radial LED, 12.6 mcd, 20 mA, 2 V, -55 to 100 degC, 2-Pin THD, RoHS, Bulk", Case\Package=Radial, Current Rating="3.6 A", Max Operating Temperature="130 degC", Min Operating Temperature="-40 degC", Package Quantity=55, Resistance="0.045 Ohm", Tolerance=20%, ComponentLink1Description="Manufacturer URL", ComponentLink1URL=http://www.us.liteon.com/, ComponentLink2Description=Datasheet, ComponentLink2URL=https://datasheet.ciiva.com/15117/getdatasheetpartid-187746-15117985.pdf, DatasheetVersion=Dec-03, Height="1.1 inch", Lead Pitch="11.44 mm", Length="0.97 inch", Mount="Through Hole", PackageDescription="2-Pin Through Hole Device, Dia 3.8 mm, Pitch 2.54 mm", PackageReference=LTL-1CHE, Packaging=Tray, Radiation Hardening=No, RoHSCompliant=true, Shielding=Unshielded, Width="0.62 inch"
J1 J3 J4 J5 J6 Q1: Package=None, Availability=Unavailable, Price=None
  J1 J3 J4 J5 J6: MP=5-146290-4
  Q1: MP=LM7805CT/NOPB
J2 J7 J8 J9: "2 Pin Terminal Block 5mm Pitch", Package=None, Availability=Unavailable, MP=KF301-2P, Price=None
K1 K2 K3 K4 K5: "General Purpose Relay DPDT _2 Form C_ 24VDC Coil Through Hole", Package=None, Availability=Unavailable, MF="TE Connectivity", MP=1-1393243-0, Price=None, SnapEDA_Link=https://www.snapeda.com/parts/1-1393243-0/TE%20Connectivity%20Potter%20&%20Brumfield%20Relays/view-part/244556/?ref=snap
L1 L2 L3 L4 L5: "Inductor Power Wirewound 470uH 10% 1KHz 25Q-Factor Ferrite 210mA 3.3Ohm DCR T/R", Package="Nonstandard Bourns", Digi-Key_Part_Number=SDR0604-471KLCT-ND, Digi-Key_Purchase_URL=https://www.digikey.com/product-detail/en/bourns-inc/SDR0604-471KL/SDR0604-471KLCT-ND/2352941?utm_source=snapeda&utm_medium=aggregator&utm_campaign=symbol, MF=Bourns, MP=SDR0604-471KL, SnapEDA_Link=https://www.snapeda.com/parts/SDR0604-471KL/Bourns/view-part/567387/?ref=snap
PS1: "0.5A DC/DC-Converter 'INNOLINE' SIP3 reg", Package=None, Availability="In Stock", Check_prices=https://www.snapeda.com/parts/R-78K5.0-0.5/Recom+Power/view-part/?ref=eda, MF="Recom Power", MP=R-78K5.0-0.5, Price=None, Purchase-URL=https://pricing.snapeda.com/search/part/R-78K5.0-0.5/?ref=eda, SnapEDA_Link=https://www.snapeda.com/parts/R-78K5.0-0.5/Recom+Power/view-part/?ref=snap
Q2 Q3 Q4 Q5 Q6 Q7: "RoHS Compliant", Package="TO-220 Infineon", Availability="In Stock", Check_prices=https://www.snapeda.com/parts/IRF530NPBF/Infineon+Technologies/view-part/?ref=eda, MF="Infineon Technologies", MP=IRF530NPBF, Price=None, Purchase-URL=https://pricing.snapeda.com/search/part/IRF530NPBF/?ref=eda, SnapEDA_Link=https://www.snapeda.com/parts/IRF530NPBF/Infineon+Technologies/view-part/?ref=snap
Q8 Q9 Q10 Q11 Q12: "Bipolar (BJT) Transistor NPN 30V 100mA 300MHz 500mW Through Hole TO-92-3", Package="TO-92 ON Semiconductor", Availability=Warning, DigiKey-Purchase-URL=https://snapeda.com/shop?store=DigiKey&id=2007035, MF="ON Semiconductor", MP=BC548, Price=None, SnapEDA_Link=https://www.snapeda.com/parts/BC548/ON%20Semiconductor/view-part/2007035/?ref=snap
R1 R2 R3 R4 R5 R10 R11 R20 R23 R32 R33 R46 R47 R48: Package=0805, Power_Rating=".25 W", Resistance=.33, Tolerance=1%, Availability="In Stock", Check_prices=https://www.snapeda.com/parts/2-2176053-0/TE+Connectivity/view-part/?ref=eda, EU_RoHS_Compliance="Compliant with Exemptions", MF="TE Connectivity", MP=2-2176053-0, Price=None, SnapEDA_Link=https://www.snapeda.com/parts/2-2176053-0/TE+Connectivity/view-part/?ref=snap
R6 R7 R12 R13 R16 R17 R18 R19 R21 R24 R25 R27 R28 R29: library part "Resistor_Through Hole", "1.02 Ohms Â±1% 0.25W, 1/4W Through Hole Resistor Axial Metal Film", Package="Axial Yageo", Availability=Warning, Check_prices=https://www.snapeda.com/parts/MFR-25FTE52-1R/Yageo/view-part/4629919/?ref=eda, MF=Yageo, MP=MFR-25FTE52-1R, Price=None, Purchase-URL=https://pricing.snapeda.com/search/part/MFR-25FTE52-1R/?ref=eda, SnapEDA_Link=https://www.snapeda.com/parts/MFR-25FTE52-1R/Yageo/view-part/4629919/?ref=snap
R8 R9 R14 R15 R22 R26: library part Resistor, Package=0805, Power_Rating=".25 W", Resistance=.33, Tolerance=1%, Availability="In Stock", Check_prices=https://www.snapeda.com/parts/2-2176053-0/TE+Connectivity/view-part/?ref=eda, EU_RoHS_Compliance="Compliant with Exemptions", MF="TE Connectivity", MP=2-2176053-0, Price=None, SnapEDA_Link=https://www.snapeda.com/parts/2-2176053-0/TE+Connectivity/view-part/?ref=snap
R30 R31 R34 R35 R36 R37 R38 R39 R40 R41 R42 R43 R44 R45 R49 R50 R51 R52 R53: "1.02 Ohms Â±1% 0.25W, 1/4W Through Hole Resistor Axial Metal Film", Package="Axial Yageo", Availability=Warning, Check_prices=https://www.snapeda.com/parts/MFR-25FTE52-1R/Yageo/view-part/4629919/?ref=eda, MF=Yageo, MP=MFR-25FTE52-1R, Price=None, Purchase-URL=https://pricing.snapeda.com/search/part/MFR-25FTE52-1R/?ref=eda, SnapEDA_Link=https://www.snapeda.com/parts/MFR-25FTE52-1R/Yageo/view-part/4629919/?ref=snap
U1: "ESP32-WROOM-32UE series Transceiver; 802.11 b/g/n (Wi-Fi, WiFi, WLAN), BluetoothÂ® Smart Ready 4.x Dual Mode Evaluation Board", Package=None, Availability="In Stock", Check_prices=https://www.snapeda.com/parts/ESP32-DEVKITC-32U/Espressif+Systems/view-part/?ref=eda, MF="Espressif Systems", MP=ESP32-DEVKITC-32U, Price=None, Purchase-URL=https://pricing.snapeda.com/search/part/ESP32-DEVKITC-32U/?ref=eda, SnapEDA_Link=https://www.snapeda.com/parts/ESP32-DEVKITC-32U/Espressif+Systems/view-part/?ref=snap
U2 U3 U4: "Half-Bridge Gate Driver IC Non-Inverting 16-SOIC", Package="SOIC-16 International Rectifier", Availability="In Stock", Check_prices=https://www.snapeda.com/parts/IR2110/Infineon+Technologies/view-part/?ref=eda, MF=Infineon, MP=IR2110, Price=None, Purchase-URL=https://pricing.snapeda.com/search/part/IR2110/?ref=eda, SnapEDA_Link=https://www.snapeda.com/parts/IR2110/Infineon+Technologies/view-part/?ref=snap
U5 U6: "Current Sensor 5A 1 Channel Hall Effect, Open Loop Bidirectional 8-SOIC (0.154, 3.90mm Width)", Package="SOIC-8 Allegro MicroSystems LLC", Availability="In Stock", Check_prices=https://www.snapeda.com/parts/ACS712ELCTR-05B-T/Allegro+MicroSystems+LLC/view-part/?ref=eda, MF="Allegro MicroSystems LLC", MP=ACS712ELCTR-05B-T, Price=None, Purchase-URL=https://pricing.snapeda.com/search/part/ACS712ELCTR-05B-T/?ref=eda, SnapEDA_Link=https://www.snapeda.com/parts/ACS712ELCTR-05B-T/Allegro+MicroSystems+LLC/view-part/?ref=snap
U7: "1/1 Transceiver Half CANbus 8-SOIC", Package="SO-8 Microchip", Availability=Unavailable, MF=Microchip, MP=MCP2562-E/SN, Price=None, SnapEDA_Link=https://www.snapeda.com/parts/MCP2562-E/SN/Microchip/view-part/1055306/?ref=snap
U8: "Optoisolator Transistor Output - 1 Channel 4-DIP", Package="DIP-4 Sharp Microelectronics", Availability="In Stock", Check_prices=https://www.snapeda.com/parts/PC817X3NSZ1B/Sharp+Microelectronics/view-part/?ref=eda, MF="Sharp Microelectronics", MP=PC817X3NSZ1B, Price=None, Purchase-URL=https://pricing.snapeda.com/search/part/PC817X3NSZ1B/?ref=eda, SnapEDA_Link=https://www.snapeda.com/parts/PC817X3NSZ1B/Sharp+Microelectronics/view-part/?ref=snap

## Via types
v1: diameter 1.27, hole 0.711, Power Layer to Signal Layer, 9 vias

## Nets (pads, with @x,y where several pads share a name; then routed paths per layer and width w, separated by ;. In a path a pad name is that pad's centre, name@x,y a point inside that pad or via, vN(x,y) a via of type N, cw(c..) or ccw(c..) an arc to the next point about the centre after c; other vN are vias at no path point)
+3.3: C3.P C8.P C10.P C26.2 J1.1 R46.2 U1.1 U2.9 U3.9 U4.9 U7.5 | length 398.2
  Power Layer w0.5: U2.9 67.996,117.17 C3.P C8.P 67.996,145.008 U4.9
  Signal Layer w0.5: U1.1 9.735,157.445 1.295,149.005 1.295,108.915 19.914,90.297 226.06,90.297 236.677,100.914 236.677,144.119 J1.1
+5: C1.2 C27.2 D1.1 D39.2 J1.3 PS1.3 U5.8 U6.8 U7.3 | length 440
  Power Layer w0.5: v1(5.461,185.674) 34.272,185.674 PS1.3 42.143,172.99 D39.2 44.31,171.677 D1.1
  Signal Layer w0.5: v1(5.461,185.674) 0.541,180.754 0.541,108.603 19.601,89.543 226.372,89.543 237.566,100.737 237.566,148.79 229.522,156.834 229.522,158.274 J1.3
+12: D4.2 D28.2 DS1.1 DS4.1 J2.1 J7.1 J8.1 J9.1 K3.11 K3.12 K3.21 K3.22 R25.2 R32.1 U6.3 U6.4 | length 288.5
  Power Layer w1: J7.1 149.276,159.802 149.276,157.251 158.394,148.133 164.744,148.133 ; 165.227,157.531 166.8,155.958 D28.2 ; 203.632,118.084 203.632,118.249 ; 203.632,118.795 DS4.1
  Power Layer w5: J8.1 165.049,102.514 173.203,110.668 ; 164.744,155.635 164.744,148.133 164.744,129.591 ; 165.227,157.531 165.482,156.372 ; 167.284,127.051 164.744,129.591 ; K3.12 210.677,130.362 203.632,123.317 203.632,118.249 196.736,111.354 168.58,111.354 162.357,117.577 162.357,127.203 164.744,129.591
  Signal Layer w1: D4.2 109.168,195.858 115.661,202.351 115.661,202.452 116.307,203.098 J2.1 152.476,169.48 J7.1 ; DS1.1 162.839,125.578 R32.1
+24: C2.2 C4.P C12.P C13.P D10.2 D11.2 D12.1 D13.1 D31.1 D33.1 DS2.1 DS5.1 DS6.1 DS7.1 DS8.1 DS9.1 K2.A1 K4.14 K4.A1 PS1.1 Q1.1 Q2.2 Q3.2 R1.2 R2.2 R3.2 R4.2 R5.2 R16.1 U5.3 U5.4 | length 464.4
  Power Layer w0.5: C2.2 37.063,175.328 PS1.1 ; D12.1 100.372,130.874 100.665,130.581 R4.2 106.469,130.616 109.499,130.616 D10.2 ; D13.1 102.789,149.2 104.759,147.23 R5.2 ; DS5.1 175.702,107.757 ; 175.702,107.045 177.537,107.045 ; 177.537,107.757 184.125,101.168 198.578,101.168 DS7.1 ; DS9.1 182.245,205.003 183.337,206.096 194.817,206.096 DS8.1 201.677,206.248 212.369,206.248 DS6.1 ; D33.1 194.496,170.994 K2.A1 199.923,169.189 199.923,162.29 K4.A1 194.81,157.177 D31.1 191.579,156.108 197.764,156.108 203.2,161.544 218.777,161.544 K4.14 ; v1(205.08,143.307) 205.08,136.83 v1(207.594,134.315)
  Power Layer w1: DS2.1 119.996,192.005 119.996,192.272 129.743,202.019 161.077,202.019 161.573,201.524 v1(161.646,201.524)
  Power Layer w3: 90.145,127.229 93.955,131.039 96.559,131.039 D12.1@100.369,134.849
  Power Layer w5: 104.013,149.327 108.56,149.327 109.062,148.824 ; 110.617,148.514 129.578,167.474 129.578,179.793 137.77,187.986 C12.P C13.P
  Signal Layer w0.5: C13.P 172.568,193.065 DS9.1 182.245,187.477 190.511,179.211 D33.1 ; K4.A1 205.08,149.901 v1(205.08,143.307) ; DS7.1 207.594,110.185 ; 207.594,109.473 207.594,110.185 ; v1(207.594,134.315) 207.594,110.185
  Signal Layer w1: Q1.1 98.288,188.544 103.858,194.115 112.488,194.115 DS2.1
CAN_1_N: J5.2 R48.2 U7.6 | length 324.9
  Power Layer w0.381: U7.6 2.195,137.846 1.865,137.516 1.127,137.516 0.532,136.92 0.532,108.4 19.058,89.873 19.244,89.687 226.272,89.687 226.458,89.873 237.261,100.677 237.261,136.189 235.569,137.881 230.693,137.881 J5.2
CAN_1_P: J5.1 R48.1 U7.7 | length 320.6
  Power Layer w0.381: U7.7 2.195,136.576 1.891,136.881 1.39,136.881 1.167,136.657 1.167,108.663 19.507,90.322 226.009,90.322 236.626,100.94 236.626,135.926 235.306,137.246 230.693,137.246 J5.1
"Coil Power": D28.1 D29.1 D30.1 D32.1 D34.1 K1.A1 K3.A1 K5.A1 | length 105.2
  Power Layer w0.5: D28.1 D29.1 ; K5.A1 191.941,116.198 D34.1 190.717,114.974 190.717,116.02 192.172,117.475 195.555,117.475 199.593,121.514 199.593,126.67 198.488,127.775 191.669,127.775 D32.1 ; K3.A1@196.307,130.141 K3.A1 194.877,128.932 D32.1 ; K1.A1 194.877,143.114 D30.1 192.503,141.122 196.621,141.122 198.755,138.989 198.755,136.22 194.158,131.623 193.201,131.623 D32.1
  Signal Layer w0.5: D29.1 190.511,149.162 D30.1
Driver_VCC: C6.P D2.1 D3.2 D4.1 D6.2 D8.2 U2.3 U3.3 U4.3 | length 172.6
  Power Layer w0.5: D3.2 57.922,103.011 63.546,103.011 64.675,104.14 U2.3
  Power Layer w1: D8.2 60.819,185.498 D2.1 D4.1 77.978,189.23 C6.P
  Signal Layer w0.5: D3.2 52.756,122.264 53.823,123.331 53.823,144.101 ; U4.3 69.077,141.67 56.254,141.67 53.823,144.101 ; U3.3 66.537,167.578 59.647,167.578 55.757,171.468 55.757,174.349 D8.2 52.714,177.275 51.68,176.241 51.68,157 52.236,156.444 52.236,145.688 D6.2 53.823,144.101
GND: C1.1 C2.1 C3.N C4.N C5.N C6.N C8.N C10.N C12.N C13.N C16.1 C17.1 C18.N C19.1 C20.N C22.1 C23.1 C24.N C25.N C26.1 C27.1 C28.N C29.N D20.3 D21.3 D27.3 J1.2 J1.4 J2.2 J5.4 J6.4 J7.2 J8.2 J9.2 K5.11 K5.12 K5.21 K5.22 PS1.2 Q1.2 Q4.3 Q5.3 Q7.3 Q8.3 Q9.3 Q10.3 Q11.3 Q12.3 R14.2 R15.2 R17.1 R19.1 R26.2 R27.1 R29.1 R30.2 R31.2 R34.2 R36.1 R38.1 R39.2 R41.1 R44.1 R45.1 U1.14 U1.32 U1.38 U2.2 U2.11 U2.13 U3.2 U3.11 U3.13 U4.2 U4.11 U4.13 U5.5 U6.5 U7.2 U7.8 U8.3
NetC5_P: C5.P D2.2 Q1.3
NetC7_1: C7.1 C21.1 D5.2 D23.3 D26.2 D27.1 L1.1 Q6.3 Q7.2 R22.2 R23.2 U2.5 | length 113.1
  Power Layer w0.5: D5.2 58.537,105.622 58.956,105.622 C7.1 ; U2.5 71.941,110.955 Q6.3@89.535,110.955 ; D27.1 103.263,96.017 104.13,96.017 R23.2 106.624,93.712 106.936,94.024 D26.2
  Power Layer w3: 89.535,109.88 89.535,109.745 D27.1
  Power Layer w5: 100.372,117.17 100.372,119.497 102.273,121.398 102.273,122.39 105.084,125.2 106.076,125.2 107.977,127.102 113.284,127.102 117.704,131.521 L1.1
  Signal Layer w0.5: C7.1 61.392,107.809 63.842,107.809 65.253,109.22 U2.5 ; R22.2 86.553,116.789 88.814,119.05 91.948,119.05 95.123,115.875 D23.3
NetC7_2: C7.2 D3.1 D5.1 R1.1 U2.6 | length 31.6
  Signal Layer w0.5: R1.1 56.08,97.497 C7.2 58.001,101.576 58.001,106.211 60.604,108.814 60.604,108.835 62.4,110.631 63.054,110.631 64.183,111.76 U2.6
NetC9_1: C9.1 C14.1 D7.2 D12.3 D16.2 D20.1 K2.11 Q3.3 Q5.2 R8.2 R10.2 U4.5 | length 226
  Power Layer w0.5: D7.2 56.963,144.187 57.382,144.187 C9.1 ; v1(66.802,148.946) 69.033,148.946 70.1,147.879 U4.5
  Power Layer w3: 104.14,163.359 R10.2 106.551,163.476 D16.2 109.533,164.042 122.25,176.759 122.25,191.338 128.524,197.612 164.32,197.612 171.283,190.65 199.888,190.65 205.426,185.112 205.426,182.587 210.437,177.576 211.836,177.576 K2.11
  Signal Layer w0.5: C9.1 61.153,142.962 62.4,144.21 63.053,144.21 66.655,147.811 66.655,148.798 v1(66.802,148.946) ; U4.5 70.409,147.879 70.784,147.504 71.687,147.504 76.925,142.265 R8.2 98.035,142.265 D12.3 104.284,143.841 104.284,144.478 C14.1 104.409,157.765 106.435,159.791 R10.2
NetC9_2: C9.2 D6.1 D7.1 R2.1 U4.6 | length 10.9
  Power Layer w0.5: R2.1 55.607,134.962 C9.2
NetC11_1: C11.1 C15.1 D9.2 D13.3 D19.2 D21.1 K2.21 Q2.3 Q4.2 R9.2 R11.2 U3.5 | length 271.3
  Power Layer w0.5: D9.2 56.183,177.392 58.863,174.712 C11.1 61.782,177.456 69.077,177.456 U3.5 70.247,176.327 71.199,175.375 88.606,175.375 89.608,176.378 Q4.2 ; R9.2 89.087,158.094 99.401,158.094 102.114,160.807 C15.1
  Power Layer w3: 95.987,179.4 95.987,182.723 97.744,184.48 101.625,184.48 106.435,179.671 R11.2 ; R11.2@106.678,179.478 D19.2 101.244,187.767 101.244,204.145 103.002,205.902 120.634,205.902 121.397,205.139 162.805,205.139 174.041,193.904 203.009,193.904 K2.21
  Signal Layer w0.5: R9.2 88.502,155.372 88.837,155.706 98.945,155.706 D13.3 ; C15.1 104.409,169.801 D21.1 102.988,173.838 106.435,177.284 R11.2
NetC11_2: C11.2 D8.1 D9.1 R3.1 U3.6 | length 27.1
  Power Layer w0.5: R3.1 56.039,166.712 C11.2
  Signal Layer w0.5: C11.2 59.039,171.836 62.4,175.198 66.537,175.198 U3.6
NetC14_2: C14.2 D10.1 R4.1 | length 7
  Power Layer w0.5: R4.1 106.624,141.581 107.194,141.011 D10.1 109.409,141.136 C14.2
NetC15_2: C15.2 D11.1 R5.1 | length 6.3
  Power Layer w0.5: R5.1 106.624,158.23 107.054,157.8 D11.1 109.409,157.925 C15.2
NetC16_2: C16.2 D16.1 R10.1 | length 6.3
  Power Layer w0.5: R10.1 106.624,174.359 107.147,173.836 D16.1 109.409,173.961 C16.2
NetC17_2: C17.2 D19.1 R11.1 | length 5.7
  Power Layer w0.5: R11.1 D19.1@109.137,190.234 ; C17.2 109.409,189.963 D19.1
NetC18_P: C18.P R16.2 R17.2 U1.26 | length 18
  Power Layer w0.254: U1.26 42.532,132.502
  Power Layer w0.5: R17.2 R16.2 44.335,142.824 C18.P
NetC19_2: C19.2 U5.6 | length 3
  Power Layer w0.5: C19.2 82.395,126.213 85.207,126.213 U5.6
NetC20_P: C20.P R18.1 R19.2 U1.6 | length 15.1
  Power Layer w0.5: R18.1 R19.2 4.66,146.626 C20.P 6.477,144.809 11.531,144.809 U1.6
NetC21_2: C21.2 D22.1 R20.1 | length 6.7
  Power Layer w0.5: R20.1 106.624,120.816 107.181,120.259 D22.1 109.533,122.326 110.298,123.09 C21.2
NetC22_2: C22.2 U6.6 | length 4.9
  Power Layer w0.5: C22.2 161.976,165.938 163.17,164.744 U6.6
NetC23_2: C23.2 D26.1 R23.1 | length 6.1
  Power Layer w0.5: R23.1 106.624,104.712 106.952,104.384 D26.1 109.409,104.509 C23.2
NetC24_P: C24.P R25.1 R27.2 U1.23 | length 15.9
  Power Layer w0.5: U1.23 37.273,119.345 37.989,120.06 C24.P 44.335,121.863 R25.1 R27.2
NetC25_P: C25.P R28.1 R29.2 U1.12 | length 15.3
  Power Layer w0.5: R28.1 R29.2 4.66,128.077 C25.P 6.576,129.667 11.432,129.667 U1.12
NetC28_P: C28.P C29.P L5.2 U6.1 U6.2 | length 133.3
  Power Layer w5: L5.2 156.388,118.854 156.388,141.173 137.77,159.791 C29.P C28.P 154.965,166.509 157.467,164.006 157.467,160.185 159.614,158.039
NetD1_2: D1.2 D39.1 U1.19 | length 3.5
  Power Layer w0.254: D39.1 40.855,161.292 D1.2
NetD14_A: D14.A Q3.1 R6.2 | length 7.7
  Signal Layer w0.5: D14.A 86.264,135.202 86.264,138.431 R6.2 88.571,138.531 Q3.1
NetD14_C: D14.C R6.1 R8.1 U4.7 | length 22.4
  Signal Layer w0.5: U4.7 68.224,150.978 68.224,148.263 69.738,146.75 70.879,146.75 R8.1 R6.1 75.364,135.302 D14.C
NetD15_A: D15.A Q2.1 R7.2 | length 8.2
  Signal Layer w0.5: D15.A 86.264,148.309 86.264,151.538 R7.2 88.333,153.607 89.295,153.607 Q2.1
NetD15_C: D15.C R7.1 R9.1 U3.7 | length 35.4
  Signal Layer w0.5: U3.7 72.79,178.823 72.79,157.946 R9.1 R7.1 75.364,148.409 D15.C
NetD17_A: D17.A Q5.1 R12.2 | length 8.3
  Signal Layer w0.5: D17.A 86.264,160.831 86.264,164.06 R12.2 88.511,166.307 89.295,166.307 Q5.1
NetD17_C: D17.C R12.1 R14.1 U4.1 | length 32.5
  Power Layer w0.5: U4.1 72.785,140.298 72.785,157.952 D17.C
  Signal Layer w0.5: R14.1 R12.1 75.364,160.931 D17.C
NetD18_A: D18.A Q4.1 R13.2 | length 8.1
  Signal Layer w0.5: D18.A 86.264,173.15 86.264,176.379 R13.2 88.13,178.245 89.295,178.245 Q4.1
NetD18_C: D18.C R13.1 R15.1 U3.1 | length 16.3
  Power Layer w0.5: U3.1 72.831,168.792 72.831,170.317 D18.C
  Signal Layer w0.5: R15.1 R13.1 75.364,173.25 D18.C
NetD22_2: D22.2 D23.1 Q6.2 R20.2 U5.1 U5.2 | length 26.7
  Power Layer w0.5: D23.1 101.268,109.899 106.435,109.899 D22.2
  Power Layer w3: U5.1 90.207,121.32 98.61,112.916 98.615,112.916 100.372,111.159 D23.1
NetD24_A: D24.A Q6.1 R21.2 | length 8.3
  Signal Layer w0.5: D24.A 86.264,109.726 86.264,112.955 R21.2 88.511,115.203 89.295,115.203 Q6.1
NetD24_C: D24.C R21.1 R22.1 U2.1 | length 20
  Power Layer w0.5: U2.1 72.785,101.639 72.785,106.847 D24.C
  Signal Layer w0.5: R22.1 R21.1 75.364,109.826 D24.C
NetD25_A: D25.A Q7.1 R24.2 | length 8.3
  Signal Layer w0.5: D25.A 86.264,97.407 86.264,100.636 R24.2 88.511,102.884 89.295,102.884 Q7.1
NetD25_C: D25.C R24.1 R26.1 U2.7 | length 19.2
  Signal Layer w0.5: U2.7 72.79,111.716 72.79,107.044 R26.1 R24.1 75.364,97.507 D25.C
NetD29_2: D29.2 K4.11 | length 45.2
  Power Layer w0.5: D29.2 174.296,155.016 212.949,155.016 K4.11
NetD30_2: D30.2 K1.A2 Q8.1 R49.2 | length 17.9
  Power Layer w0.5: Q8.1 183.913,153.474 D30.2 191.941,152.044 K1.A2
NetD31_2: D31.2 K4.A2 Q9.1 R50.2 | length 48.3
  Power Layer w0.5: Q9.1 183.853,167.537 D31.2 191.874,166.174 K4.A2
  Signal Layer w0.5: K4.A2 196.584,166.451 196.584,167.414 213.446,184.276 213.805,184.276 R50.2
NetD32_2: D32.2 K3.A2 Q10.1 R51.2 | length 85.8
  Power Layer w0.5: Q10.1@180.824,136.289 183.828,139.292 D32.2 194.877,139.292 K3.A2 ; v1(188.849,116.078) 192.426,119.655 194.356,119.655 197.815,123.115 v1(197.815,126.06)
  Signal Layer w0.5: Q10.1 184.602,132.512 184.602,130.868 186.835,128.635 ; 186.835,127.898 195.977,127.898 v1(197.815,126.06) ; v1(188.849,116.078) 188.849,112.366 205.232,95.983 R51.2
NetD33_2: D33.2 K2.A2 Q11.1 R52.2 | length 26.2
  Power Layer w0.5: Q11.1 183.133,181.354 D33.2 194.916,181.354 195.965,180.305 K2.A2 199.441,183.439 R52.2
NetD34_2: D34.2 K5.A2 Q12.1 R53.2 | length 90
  Power Layer w0.5: v1(175.089,162.973) 179.252,167.136 179.252,183.505 R53.2 ; v1(179.883,131.902) 179.883,131.694 180.456,131.121 180.456,122.357 ; Q12.1 183.963,125.128 D34.2 194.877,125.128 K5.A2
  Signal Layer w0.5: v1(175.089,162.973) 175.236,162.826 175.602,162.826 178.024,160.404 178.024,136.24 ; 178.024,136.976 179.883,135.118 v1(179.883,131.902)
NetD35_1: D35.1 D36.2 J3.1 J3.2 K2.14 | length 283
  Power Layer w0.5: D36.2 D35.1
  Signal Layer w0.5: D36.2 8.208,197.464 20.113,209.368 20.527,209.368 21.336,208.559 217.729,208.559 234.544,191.745 234.544,175.489 230.241,171.186 230.067,171.186 229.64,170.759 J3.2
NetD35_2: D35.2 D37.2 U8.2 | length 27.3
  Power Layer w0.5: D35.2 11.383,176.528 D37.2 16.443,177.818 20.842,177.818 22.664,175.997 U8.2
NetD36_1: D36.1 D38.1 R47.1 | length 27.1
  Power Layer w0.5: D36.1 8.208,176.579 D38.1 6.383,181.002 17.845,181.002 R47.1
NetD37_1: D37.1 D38.2 J3.3 J3.4 K2.24 | length 286.9
  Power Layer w0.5: D37.1 13.259,168.044 6.383,168.044 D38.2 1.676,172.75 1.676,190.094 20.574,208.991 217.729,208.991 221.647,205.073 K2.24
NetDS1_2: DS1.2 R30.1 | length 2.4
  Power Layer w0.5: R30.1 DS1.2
NetDS2_2: DS2.2 R31.1
NetDS3_1: DS3.1 K1.11 K1.12 K1.21 K1.22 R33.2 | length 98.7
  Signal Layer w0.5: 167.779,122.352 167.779,114.237 171.602,110.414 185.724,110.414 DS3.1
  Signal Layer w3: R33.2 171.538,122.352 177.253,128.067 182.855,128.067 190.373,120.548 197.328,120.548 204.447,127.668 204.447,137.425 K1.12
NetDS3_2: DS3.2 R34.1 | length 4.5
  Power Layer w0.5: R34.1 190.881,105.308 DS3.2
NetDS4_2: DS4.2 R39.1
NetDS5_2: DS5.2 R49.1 | length 4.5
  Power Layer w0.5: R49.1 177.038,103.849 DS5.2
NetDS6_2: DS6.2 R50.1 | length 4.4
  Signal Layer w0.5: R50.1 218.415,199.886 DS6.2
NetDS7_2: DS7.2 R51.1 | length 4.5
  Power Layer w0.5: R51.1 206.502,103.848 DS7.2
NetDS8_2: DS8.2 R52.1 | length 4.5
  Signal Layer w0.5: R52.1 200.711,200.038 DS8.2
NetDS9_2: DS9.2 R53.1 | length 4.5
  Signal Layer w0.5: R53.1 184.785,200.038 DS9.2
NetJ4_1: J4.1 J4.2 K1.14 K1.24 K3.14 K3.24
NetJ4_3: J4.3 J4.4 K5.14 K5.24
NetJ6_2: J6.2 U1.30
NetJ6_3: J6.3 U1.15
NetL1_2: L1.2 L2.1 | length 26.2
  Power Layer w5: L2.1 127.704,127.264 L1.2
NetL2_2: L2.2 L3.1 | length 25.9
  Power Layer w5: L2.2 137.058,126.619 L3.1
NetL3_2: L3.2 L4.1 | length 26.2
  Power Layer w5: L4.1 147.058,127.297 L3.2
NetL4_2: L4.2 L5.1 | length 20.3
  Power Layer w5: L5.1 134.283,104.521 L4.2
NetQ8_2: Q8.2 R35.1 | length 8.4
  Power Layer w0.5: R35.1 179.852,146.914 Q8.2
NetQ9_2: Q9.2 R37.1 | length 8.4
  Power Layer w0.5: R37.1 179.826,161.011 Q9.2
NetQ10_2: Q10.2 R40.1 | length 8.4
  Power Layer w0.5: R40.1 179.776,133.477 Q10.2
NetQ11_2: Q11.2 R42.1 | length 8.4
  Signal Layer w0.5: R42.1 179.756,175.477 Q11.2
NetQ12_2: Q12.2 R43.1 | length 8.4
  Power Layer w0.5: R43.1 179.786,118.451 Q12.2
NetR18_2: R18.2 U5.7
NetR28_2: R28.2 U6.7
NetR32_2: R32.2 R33.1 | length 3.2
  Power Layer w3: 177.394,122.682 178.093,123.381 R32.2
NetR35_2: R35.2 R36.2 U1.7 | length 3.3
  Power Layer w0.5: R36.2 R35.2
NetR37_2: R37.2 R38.2 U1.11 | length 3.3
  Power Layer w0.5: R38.2 R37.2
NetR40_2: R40.2 R41.2 U1.8 | length 3.3
  Power Layer w0.5: R41.2 R40.2
NetR42_2: R42.2 R44.2 U1.10 | length 3.3
  Power Layer w0.5: R44.2 R42.2
NetR43_2: R43.2 R45.2 U1.9 | length 3.2
  Power Layer w0.5: R45.2 R43.2
NetR46_1: R46.1 U1.5 U8.4 | length 30.1
  Power Layer w0.5: U1.5 19.37,155.06 R46.1 19.37,171.767 U8.4
NetR47_2: R47.2 U8.1 | length 6.7
  Power Layer w0.5: U8.1 30.37,175.147 R47.2
NetU1_27: U1.27 U7.4
NetU1_28: U1.28 U7.1
NetU1_31: U1.31 U3.10 U4.12 | length 71.5
  Power Layer w0.5: 62.586,109.22 53.617,118.189 53.617,126.34 47.851,132.107 47.851,134.914 44.792,137.973 38.686,137.973 U1.31 59.451,139.665 U4.12
NetU1_33: U1.33 U3.12 U4.10 | length 81.4
  Power Layer w0.5: 62.586,104.14 51.258,115.468 51.258,124.669 40.073,135.854 36.471,135.854 35.726,136.599 35.726,143.476 U1.33 40.254,148.004 62.46,148.004 U4.10
NetU1_36: U1.36 U2.10 | length 44.9
  Power Layer w0.5: U1.36 38.735,154.105 38.735,158.064 40.056,159.385 57.658,159.385 61.189,162.916 61.189,174.929 62.586,176.327
NetU1_37: U1.37 U2.12
pads on no net: ?.1 J5.3 J6.1 K2.12 K2.22 K4.12 K4.21 K4.22 K4.24 U1.2 U1.3 U1.4 U1.13 U1.16 U1.17 U1.18 U1.20 U1.21 U1.22 U1.24 U1.25 U1.29 U1.34 U1.35 U2.4 U2.8 U2.14 U3.4 U3.8 U3.14 U4.4 U4.8 U4.14

## Polygon pours and split planes (outlines as drawn)
+24 on Power Layer "+24_L01_P011" (solid, remove dead copper, pour order 11): 88.849,152.832 102.235,152.832 102.235,147.193 95.047,147.193 95.047,150.52 88.849,150.52
NetC9_1 on Power Layer "NETC9_1_L01_P010" (solid, remove dead copper, pour order 10): 88.849,165.532 102.235,165.532 102.235,159.893 95.047,159.893 95.047,163.22 88.849,163.22
NetC11_1 on Power Layer "NETC11_1_L01_P009" (solid, remove dead copper, pour order 9): 88.849,177.47 102.235,177.47 102.235,171.831 95.047,171.831 95.047,175.158 88.849,175.158
NetD35_1 on Power Layer "NETD35_1_L01_P006" (solid, remove dead copper, pour order 6): 219.913,175.108 224.053,175.108 224.282,175.108 224.282,172.364 231.724,172.364 231.724,171.958 231.724,165.633 224.663,165.633 224.663,168.351 219.913,168.351
NetD22_2 on Power Layer "NETD22_2_L01_P013" (solid, remove dead copper, pour order 13): 88.849,114.427 102.235,114.427 102.235,108.788 95.047,108.788 95.047,112.116 88.849,112.116
+24 on Power Layer "+24_L01_P012" (solid, remove dead copper, pour order 12): 88.849,138.481 102.235,138.481 102.235,132.842 95.047,132.842 95.047,136.169 88.849,136.169
NetC7_1 on Power Layer "NETC7_1_L01_P014" (solid, remove dead copper, pour order 14): 88.849,102.54 102.235,102.54 102.235,96.901 95.047,96.901 95.047,100.229 88.849,100.229
NetDS3_1 on Power Layer "NETDS3_1_L01_P007" (solid, remove dead copper, pour order 7): 208.864,154.543 209.067,154.543 219.481,154.543 219.481,141.843 208.864,141.843
NetD37_1 on Power Layer "NETD37_1_L01_P005" (solid, remove dead copper, pour order 5): 220.167,182.448 220.243,182.372 232.054,182.372 232.054,172.72 231.673,172.72 224.866,172.72 224.866,176.022 220.167,176.022
GND on Power Layer "GND_L01_P001" (solid, remove dead copper, pour order 1): 209.55,125.425 219.1,125.425 219.1,113.97 209.55,113.97
+12 on Power Layer "+12_L01_P003" (solid, remove dead copper, pour order 3): 208.864,140.36 209.067,140.36 219.481,140.36 219.481,127.66 208.864,127.66
NetJ4_3 on Power Layer "NETJ4_3_L01_P000" (solid, remove dead copper, pour order 0): 219.888,125.324 220.269,125.324 231.318,125.324 231.318,112.395 230.988,112.395 219.888,112.395
NetC7_1 on Signal Layer "NETC7_1_L04_P017" (solid, remove dead copper, pour order 17): 88.392,112.116 88.443,112.065 93.167,112.065 93.167,118.085 95.91,118.085 103.683,118.085 103.683,112.522 97.612,112.522 97.612,108.509 97.612,108.153 96.647,108.153 88.443,108.153
NetC9_1 on Signal Layer "NETC9_1_L04_P016" (solid, remove dead copper, pour order 16): 88.392,136.169 88.443,136.119 93.167,136.119 93.167,142.138 95.91,142.138 103.683,142.138 103.683,136.576 97.612,136.576 97.612,132.563 97.612,132.207 96.647,132.207 88.443,132.207
NetC11_1 on Signal Layer "NETC11_1_L04_P015" (solid, remove dead copper, pour order 15): 88.265,150.393 88.316,150.343 93.04,150.343 93.04,156.362 95.783,156.362 103.556,156.362 103.556,150.8 97.485,150.8 97.485,146.787 97.485,146.431 96.52,146.431 88.316,146.431
NetDS3_1 on Signal Layer "NETDS3_1_L04_P008" (solid, remove dead copper, pour order 8): 208.864,154.543 209.067,154.543 219.481,154.543 219.481,141.843 208.864,141.843